# EAGLE board MINI_SAM_D51_009 (EAGLE 9.1.1)
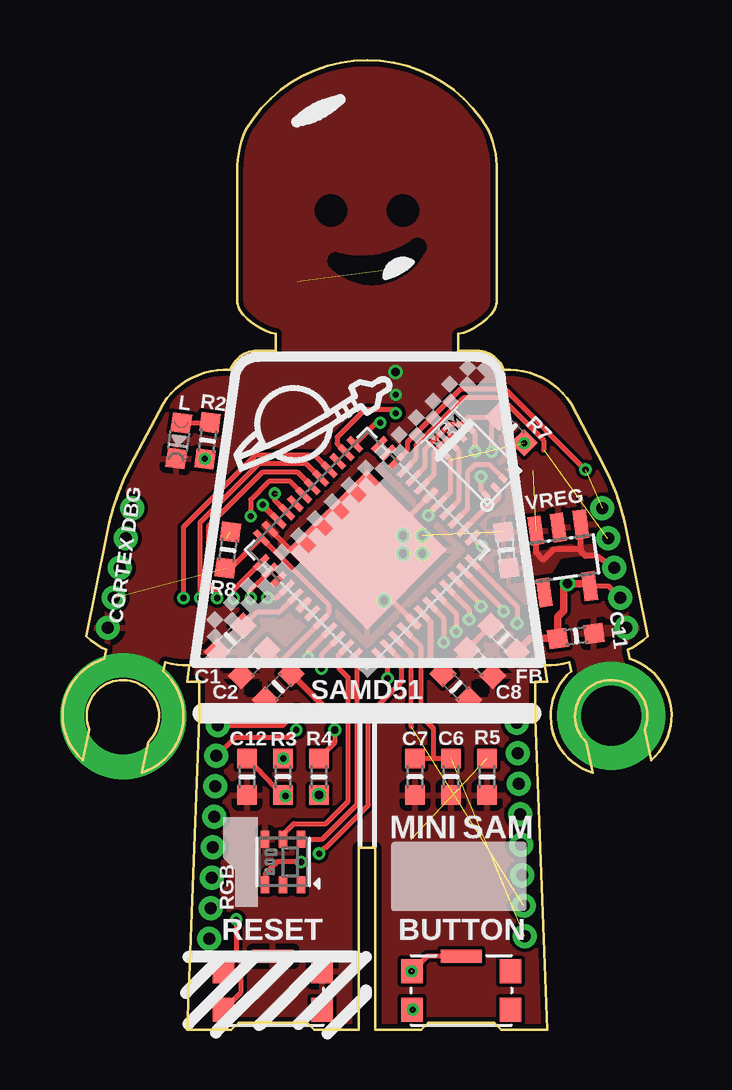
[diagram p0: board, top side]
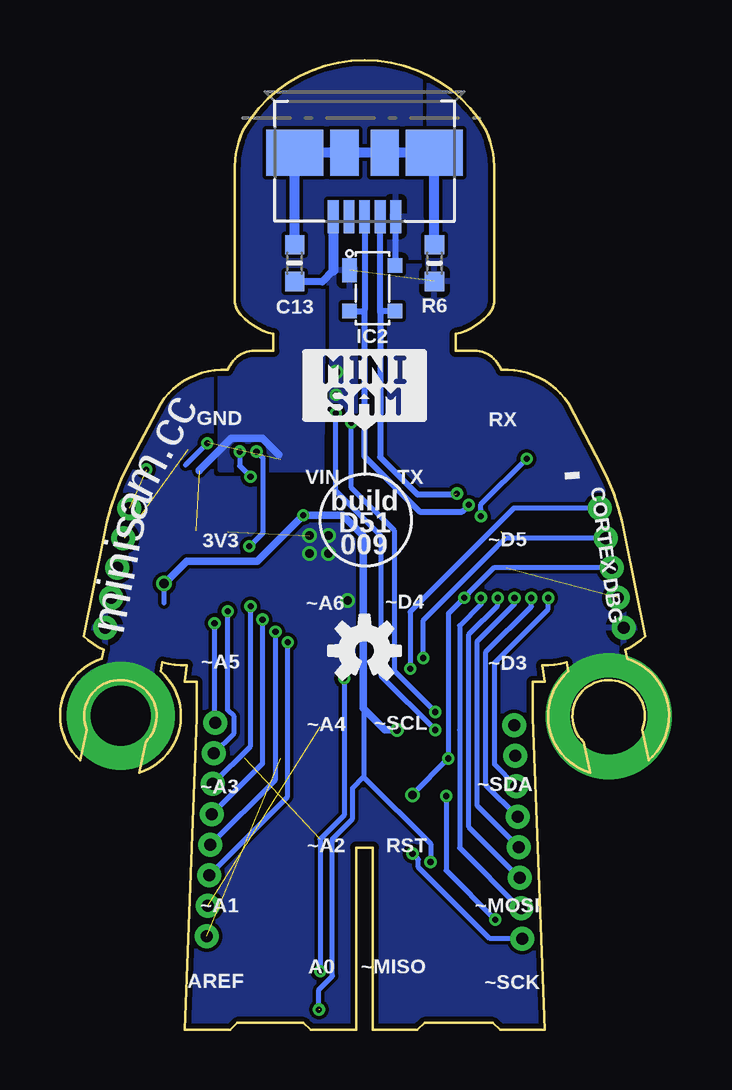
[diagram p1: board, bottom side, seen from below]

Size 25.38 x 40.42 mm. Coordinates in mm from the lower left corner, seen from the top.
Outline: 7.54,29.8 arc-40 7.29,30.3
Outline: 7.29,30.3 7.29,36
Outline: 18.09,30.3 18.09,36
Outline: 7.64,37.5 arc-120 17.74,37.5
Outline: 7.29,36 arc-25 7.64,37.5
Outline: 18.09,36 arc25 17.74,37.5
Outline: 7.54,29.8 arc35 8.89,29
Outline: 17.84,29.8 arc40 18.09,30.3
Outline: 17.84,29.8 arc-35 16.49,29
Outline: 8.01,28.3 arc63 6.99,27.5
Outline: 18.39,27.5 arc63 17.37,28.3
Outline: 6.99,27.5 arc60 4.19,26.1 2.82,23.5 arc18 1.83,20.54 0.99,16.4 arc15 1.82,15.83 1.75,15.46 arc122 0.85,11.24 1.12,12.52 arc-125 2.83,14.54 arc-125 3.56,12
Outline: 18.39,27.5 arc-60 21.19,26.1 22.55,23.5 arc-18 23.55,20.54 24.39,16.4 arc-15 23.55,15.83 23.63,15.46 arc-122 24.53,11.24 24.26,12.52 arc125 22.55,14.54 arc125 21.81,12 22.08,10.72 arc-122 21.19,14.95 21.11,15.31 arc-15 20.09,15.2 20.19,14.5 19.69,14.5 19.69,13 20.19,0 18.29,0 17.99,0.3 15.24,0.3 14.94,0 13.04,0 13.04,7.6 12.34,7.6 12.34,0 10.49,0 10.19,0.3 7.34,0.3 7.04,0 5.19,0 5.69,13 5.69,14.5 5.19,14.5 5.29,15.2 arc-15 4.27,15.31 4.19,14.95 arc-122 3.29,10.72
Outline: 3.56,12 3.29,10.72
Outline: 3.56,12 3.29,10.72
Outline: 8.01,28.3 8.69,28.3 8.89,28.3 8.89,29
Outline: 8.01,28.3 arc63 6.99,27.5
Outline: 18.39,27.5 arc63 17.37,28.3
Outline: 17.37,28.3 16.69,28.3 16.49,28.3 16.49,29
Outline: 7.54,29.8 arc-40 7.29,30.3
Outline: 7.29,30.3 7.29,36
Outline: 18.09,30.3 18.09,36
Outline: 7.64,37.5 arc-120 17.74,37.5
Outline: 7.29,36 arc-25 7.64,37.5
Outline: 18.09,36 arc25 17.74,37.5
Outline: 7.54,29.8 arc35 8.89,29
Outline: 17.84,29.8 arc40 18.09,30.3
Outline: 17.84,29.8 arc-35 16.49,29
Copper layers (1*16): Top 0.035559375mm / dielectric 1.6mm / Bottom 0.035559375mm
Design rules "oshpark-2layer-tented *": minimum track width 6mil, minimum drill 10mil, track to track 6mil, track to pad 6mil, pad to pad 6mil, via to via 6mil, smd to smd 6mil, copper to edge 8mil, drill to drill 6mil, minimum pad ring 5mil, minimum via ring 5mil, stop-mask expansion 2.5mil, vias tented up to drill 20mil, thermal gap 10mil
tRestrict: area 11.1,31.2 to 15,32.9; area 10.9,33.9 to 11.5,34.4; area 13.9,33.9 to 14.5,34.4; 5 lines

## Footprints (pad centres in the part's own frame; a part is rotated, then mirrored left to right if it is on the bottom)
_0603MP = smd 0.8 x 0.8: 1 -0.762,0; 2 0.762,0
SOT143B_REFLOW = smd 1 x 0.6: P1 -0.75,-0.95 | smd 0.6 x 0.6: P2 0.95,-0.95; P$3 0.95,0.95; P$4 -0.95,0.95
TQFN48_7MM = smd 0.25 x 0.75: 1 -2.75,-3.475; 2 -2.25,-3.475; 3 -1.75,-3.475; 4 -1.25,-3.475; 5 -0.75,-3.475; 6 -0.25,-3.475; 7 0.25,-3.475; 8 0.75,-3.475; 9 1.25,-3.475; 10 1.75,-3.475; 11 2.25,-3.475; 12 2.75,-3.475; 25 2.75,3.475; 26 2.25,3.475; 27 1.75,3.475; 28 1.25,3.475; 29 0.75,3.475; 30 0.25,3.475; 31 -0.25,3.475; 32 -0.75,3.475; 33 -1.25,3.475; 34 -1.75,3.475; 35 -2.25,3.475; 36 -2.75,3.475 | smd 0.75 x 0.25: 13 3.475,-2.75; 14 3.475,-2.25; 15 3.475,-1.75; 16 3.475,-1.25; 17 3.475,-0.75; 18 3.475,-0.25; 19 3.475,0.25; 20 3.475,0.75; 21 3.475,1.25; 22 3.475,1.75; 23 3.475,2.25; 24 3.475,2.75; 37 -3.475,2.75; 38 -3.475,2.25; 39 -3.475,1.75; 40 -3.475,1.25; 41 -3.475,0.75; 42 -3.475,0.25; 43 -3.475,-0.25; 44 -3.475,-0.75; 45 -3.475,-1.25; 46 -3.475,-1.75; 47 -3.475,-2.25; 48 -3.475,-2.75 | smd 4.7 x 4.7: THERMAL 0,0
MOLEX_47346-1001 = smd 0.45 x 1.38: P1 1.3,-2.66; P2 0.65,-2.66; P3 0,-2.66; P4 -0.65,-2.66; P5 -1.3,-2.66 | smd 2.375 x 1.9: PAD1 -2.913,0; PAD4 2.913,0 | smd 1.175 x 1.9: PAD2 -0.838,0; PAD3 0.838,0
1X5_HEADER_1.27MM = drill 0.5 pad 1: P$1 -2.54,0; P$2 -1.27,0; P$3 0,0; P$4 1.27,0; P$5 2.54,0
1X8_HEADER_1.27MM = drill 0.5 pad 1: P$1 -4.445,0; P$2 -3.175,0; P$3 -1.905,0; P$4 -0.635,0; P$5 0.635,0; P$6 1.905,0; P$7 3.175,0; P$8 4.445,0
CHIPLED_0603_NOOUTLINE = smd 0.8 x 0.8: A 0,-0.75; C 0,0.75
APA102_2020 = smd 0.7 x 0.35: 1 -0.95,-0.75; 2 -0.95,0; 3 -0.95,0.75; 4 0.95,0.75; 5 0.95,0; 6 0.95,-0.75
KMS_SWITCH = smd 0.9 x 1: 1 -2.05,-0.8; 2 -2.05,0.8; 4 2.05,0.8; 5 2.05,-0.8 | smd 1.7 x 0.55: 3 0,1.425
USON8 = smd 0.35 x 0.25: 1 -1.2,0.75; 2 -1.2,0.25; 3 -1.2,-0.25; 4 -1.2,-0.75; 5 1.2,-0.75; 6 1.2,-0.25; 7 1.2,0.25; 8 1.2,0.75
SOT23-5 = smd 0.55 x 1.2: 1 -0.95,-1.3; 2 0,-1.3; 3 0.95,-1.3; 4 0.95,1.3; 5 -0.95,1.3

## Placement (x,y rotation side)
C1  0.1µF  [_0603MP]  6.99,16.3 225 top
C2  10µF  [_0603MP]  7.99,15.3 225 top
C3  0.1µF  [_0603MP]  8.99,14.3 225 top
C6  4.7µF  [_0603MP]  16.19,10.55 270 top
C7  0.1µF  [_0603MP]  14.69,10.55 270 top
C8  0.1µF  [_0603MP]  17.39,15.3 315 top
C9  10µF  [_0603MP]  16.39,14.3 315 top
C10  10µF  [_0603MP]  18.49,20 278 top
C11  10µF  [_0603MP]  21.39,16.42 7.9 top
C12  0.1µF  [_0603MP]  7.69,10.55 90 top
C13  4.7nF  [_0603MP]  15.6,31.95 270 bottom
FB  [_0603MP]  18.39,16.3 135 top
IC2  PRTR5V0U2X  [SOT143B_REFLOW]  12.36,30.9 270 bottom
IC4  ATSAMD51G_TQFN48  [TQFN48_7MM]  12.69,20 45 top
J1  MOLEX_47346-100147346  [MOLEX_47346-1001]  12.69,36.55 0 bottom
J2  1X5_HEADER_1.27MM  [1X5_HEADER_1.27MM]  2.39,19.25 258.5 top
J3  1X8_HEADER_1.27MM  [1X8_HEADER_1.27MM]  6.29,8.25 267.8 top
J4  1X5_HEADER_1.27MM  [1X5_HEADER_1.27MM]  22.99,19.25 281.5 top
J5  1X8_HEADER_1.27MM  [1X8_HEADER_1.27MM]  19.09,8.35 272.2 top
L  [CHIPLED_0603_NOOUTLINE]  4.84,24.55 172 top
R2  1k  [_0603MP]  6.04,24.55 262 top
R3  330Ohm  [_0603MP]  9.19,10.55 270 top
R4  10K  [_0603MP]  10.69,10.55 90 top
R5  10K  [_0603MP]  17.69,10.55 90 top
R6  1M  [_0603MP]  9.78,31.95 90 bottom
R7  100k  [_0603MP]  18.69,25 135 top
R8  1k  [_0603MP]  6.89,20 262 top
RGB  AP102-2020  [APA102_2020]  9.19,7 90 top
SW1  KMS233GLFG  [KMS_SWITCH]  8.76,1.65 0 top
SW2  KMS233GLFG  [KMS_SWITCH]  16.61,1.65 0 top
U1  GD25x16  [USON8]  17.34,23.65 135 top
U$3  [OSHW-LOGO-S]  12.69,15.8 0 bottom
VREG  AP2112K-3.3V  [SOT23-5]  20.84,19.65 187.9 top

## Library data of the parts
C1-C3 C6-C13 FB IC4 L R2-R8 RGB U1 = microbuilder
IC2 J1-J5 SW1 SW2 = Shockley_Custom
U$3 = SparkFun-Aesthetics
VREG = SparkFun-PowerIC; PROD_ID: VREG-12457

## Nets
!RESET: IC4.40 J2.P$3 R3.1 R4.1
A0: IC4.3 J5.P$7
A1: IC4.7 J5.P$6
A2: IC4.8 J5.P$5
A3: IC4.9 J5.P$4
A4: IC4.10 J5.P$3
A5: IC4.11 J5.P$2
A6: IC4.12 J5.P$1
AREF: C6.1 C7.1 IC4.4 J5.P$8
BUTTON_D6: IC4.1 R5.2 SW2.2 SW2.3
D3: IC4.28 J3.P$3
D4: IC4.29 J3.P$4
D5: IC4.30 J3.P$5
D12: IC4.32
D13: IC4.31 R2.2
DOTSTAR_CLK: IC4.47 RGB.5
DOTSTAR_DATA: IC4.48 RGB.6
GND: C1.2 C2.2 C3.2 C6.2 C7.2 C8.2 C9.2 C10.1 C11.2 C12.1 C13.2 IC2.P1 IC4.5 IC4.18 IC4.35 IC4.42 IC4.THERMAL J1.P5 J2.P$5 J4.P$5 L.C R5.1 R6.1 RGB.4 SW1.3 SW1.4 U1.4 VREG.2
MISO: IC4.38 J3.P$7
MOSI: IC4.37 J3.P$6
N$2: C13.1 J1.PAD1 J1.PAD2 J1.PAD3 J1.PAD4 R6.2
N$3: L.A R2.1
N$4: C12.2 R3.2 SW1.1
N$9: C1.1 IC4.41
QSPI_CS: IC4.20 R7.2 U1.1
QSPI_DATA[0]: IC4.13 U1.5
QSPI_DATA[1]: IC4.14 U1.2
QSPI_DATA[2]: IC4.15 U1.3
QSPI_DATA[3]: IC4.16 U1.7
QSPI_SCK: IC4.19 U1.6
RX_D0: IC4.25 J3.P$1
SCK: IC4.2 J3.P$8
SCL: IC4.22 J4.P$1
SDA: IC4.21 J4.P$2
SWCLK: IC4.45 J2.P$2 R8.1
SWDIO: IC4.46 J2.P$1
TX_D1: IC4.26 J3.P$2
USBD+ [USB_DATA]: IC2.P2 IC4.34 J1.P3
USBD- [USB_DATA]: IC2.P$3 IC4.33 J1.P2
VDD: C2.1 C3.1 C11.1 FB.1 IC4.17 IC4.36 IC4.44 J2.P$4 J4.P$4 R4.2 R7.1 R8.2 RGB.3 SW2.1 U1.8 VREG.5
VDDANA: C8.1 C9.1 FB.2 IC4.6
VIN: C10.2 IC2.P$4 J1.P1 J4.P$3 VREG.1 VREG.3
VSW: IC4.43

## Tracks (layer width: path | path; a pad name or v marks a point on that pad's centre or on a via)
!RESET  (via drill 0.25, 0.35)
  Top 0.203: IC4.40 8.93,18.01 v8.54,18.01 | R3.1 v9.2,11.31
  Bottom 0.203: R4.1 10.69,9.82 v9.2,11.31 9.2,17.35 v8.54,18.01 8.35,18.2 8.35,18.21 7.31,19.25 J2.P$3
  other vias: 10.69,9.79
A0  (1 unrouted)
  Top 0.203: IC4.3 14.54,15.68 14.54,12.63
A1  (via drill 0.25)
  Top 0.203: IC4.7 15.89,17.15 v15.89,16.15
  Bottom 0.203: J5.P$6 15.89,9.72 15.89,16.1 v15.89,16.15
A2  (via drill 0.25)
  Top 0.203: IC4.8 16.4,17.35 v16.4,16.59
  Bottom 0.203: J5.P$5 16.4,10.43 v16.4,16.59
A3  (via drill 0.25)
  Top 0.203: IC4.9 16.94,17.52 v16.94,17.1
  Bottom 0.203: J5.P$4 16.94,11.11 v16.94,17.1
A4  (via drill 0.25)
  Top 0.203: IC4.10 17.44,17.73 v17.44,17.65
  Bottom 0.203: J5.P$3 17.44,11.83 v17.44,17.65
A5  (via drill 0.25)
  Top 0.203: IC4.11 18.39,17.48 v18.39,17.45
  Bottom 0.203: v18.39,17.45 18.39,13.33 18.12,13.06 18.12,12.37 J5.P$2
A6  (via drill 0.25)
  Top 0.203: IC4.12 18.94,17.64 v18.94,16.95
  Bottom 0.203: J5.P$1 18.94,12.81 v18.94,16.95
AREF  (1 unrouted)
  Top 0.203: IC4.4 14.92,16 14.92,13.1 15.44,12.58 15.44,11.31 | C7.1 15.44,11.31 | 15.44,11.31 C6.1
BUTTON_D6  (via drill 0.25)  (2 unrouted)
  Top 0.203: IC4.1 13.54,15.26 v13.54,14.65 | SW2.3 15.19,3.08 SW2.2
  Bottom 0.203: v13.54,14.65 13.54,8.95 14.54,7.95 v14.54,2.45
D3  (via drill 0.25)
  Top 0.203: IC4.28 10.51,23.95 8.03,23.95 5.04,20.96 v5.04,18 | IC4.28
  Bottom 0.203: J3.P$3 7.27,11.06 7.27,15.3 5.04,17.54 v5.04,18
D4  (via drill 0.25)
  Top 0.203: IC4.29 10.16,23.59 8.18,23.59 5.72,21.14 5.72,18.02 v5.74,18 | IC4.29
  Bottom 0.203: J3.P$4 7.63,10.2 7.63,15.75 5.74,17.64 v5.74,18
D5  (via drill 0.25)
  Top 0.203: IC4.30 9.8,23.24 8.33,23.24 6.08,20.99 6.08,18.59 6.44,18.22 v6.44,18 | IC4.30
  Bottom 0.203: J3.P$5 7.98,9.33 7.98,16.21 6.44,17.75 v6.44,18
D13  (via drill 0.25)
  Top 0.203: IC4.31 9.48,22.86 8.6,22.86 7.84,22.1 7.84,21.67 v7.84,21.4
  Bottom 0.203: v7.84,21.4 7.84,21.67 7.84,21.9 R2.2
  other vias: 5.93,23.8
DOTSTAR_CLK
  Top 0.203: RGB.5 9.19,8.13 9.36,8.32 9.64,8.6 10.97,8.6 11.89,9.51 11.89,14.7 11.49,15.1 11.49,15.62 IC4.47
DOTSTAR_DATA
  Top 0.203: RGB.6 10.83,7.95 12.28,9.4 12.28,15.5 IC4.48
GND  (via drill 0.25, 0.35, 2.5 pad 4.5, 3.2 pad 5.25)  (2 unrouted)
  Top 0.203: IC4.5 13.04,18.59 13.04,19.15 | 13.04,19.15 13.04,20 | IC4.18 13.04,20 | 13.04,20 IC4.THERMAL 12.84,19.85 v14.19,19.85 | IC4.35 10.36,19.15 13.04,19.15
  Bottom 0.305: C13.2 14.45,31.18 13.99,31.65
  Bottom 0.406: J1.P5 13.99,31.65
  other vias: 2.52,13.08 22.85,13.09 13.39,17.9 13.87,27.42 14.99,19.85 14.19,20.6 14.99,20.6 13.88,26.46
  pour Top (rank 2): 5.19,0 20.19,0 20.19,12 21.69,12 21.69,14 22.69,14 22.69,12 24.69,12 24.69,42 0.69,42 0.69,12 2.69,12 2.69,14 3.69,14 3.69,12 5.19,12
  pour Bottom (rank 2): 10.39,42 10.39,32 14.19,32 14.19,27.35 24.69,27.35 24.69,12 20.19,12 20.19,0 5.19,0 5.19,12 3.69,12 3.69,14 2.69,14 2.69,12 0.69,12 0.69,42
MISO  (via drill 0.25)
  Top 0.203: v7.84,18 7.84,18.33 7.85,18.34 | IC4.38 8.15,18.64 | 8.15,18.64 | 8.15,18.64 7.85,18.34 | 7.85,18.34
  Bottom 0.203: v7.84,18 7.84,17.74 8.73,16.85 8.73,12.5 8.73,7.59 6.19,5.05 J3.P$7
MOSI  (via drill 0.25)
  Top 0.203: IC4.37 7.14,18.34 v7.14,18
  Bottom 0.203: J3.P$6 6.23,6.35 8.34,8.45 8.34,16.48 7.14,17.68 v7.14,18
N$2
  Bottom 0.406: R6.2 J1.PAD4 J1.PAD3 J1.PAD2 J1.PAD1 C13.1
N$3
  Top 0.203: L.A R2.1
N$4  (via drill 0.25)
  Top 0.203: C12.2 9.19,9.73 R3.2 9.23,9.75 v9.29,9.75 | v7.24,4.6 7.24,3.23 7.42,3.06 7.42,1.55 SW1.1
  Bottom 0.203: v9.29,9.75 9.29,6.65 v7.24,4.6
N$9
  Top 0.203: IC4.41 9.03,17.4 8.09,17.4 C1.1
QSPI_CS  (via drill 0.25)
  Top 0.203: IC4.20 15.09,23.45 15.09,24.21 16.12,25.24 16.6,25.24 16.9,25.54 R7.2 17.89,25.28 v17.89,24.1 | U1.1 17.44,22.49 v17.44,23.05
  Bottom 0.203: v17.89,24.1 17.89,23.5 v17.44,23.05
QSPI_DATA[0]  (via drill 0.25)
  Top 0.203: IC4.13 17.45,20.15 v17.49,20.15 | v17.19,24.1 17.19,24.86 U1.5
  Bottom 0.203: v17.49,20.15 v17.48,20.15 16.91,20.71 16.91,23.83 v17.19,24.1
QSPI_DATA[1]
  Top 0.203: IC4.14 17.67,21.8 17.69,21.8 17.8,21.8 18.19,22.19 18.19,22.45 U1.2
QSPI_DATA[2]
  Top 0.203: IC4.15 16.89,21.73 16.89,23.27 17.18,23.56 17.78,23.56 U1.3
QSPI_DATA[3]
  Top 0.203: IC4.16 16.53,22.07 16.53,24.11 U1.7
QSPI_SCK
  Top 0.203: IC4.19 15.49,23.16 15.49,24.11 16.24,24.85 16.49,24.85 U1.6
RX_D0  (via drill 0.25)
  Top 0.203: J3.P$1 9.18,12.69 v9.74,13.25 | IC4.25 13.07,25.3 v13.24,25.3
  Bottom 0.203: v9.74,13.25 11.44,14.95 11.44,20.8 13.24,22.6 v13.24,25.3
SCK  (via drill 0.25)
  Top 0.203: IC4.2 14.14,15.37 14.14,14.5 12.75,13.11 12.75,9.37 10.98,7.59 10.93,7.59 v10.69,7.35
  Bottom 0.203: v10.69,7.35 10.45,7.11 10.45,6.79 7.47,3.81 J3.P$8
SCL  (via drill 0.25)  (1 unrouted)
  Top 0.203: IC4.22 14.38,24.16 14.38,24.5 16.59,26.71 18.42,26.71 v21.79,23.35
SDA  (1 unrouted)
  Top 0.203: IC4.21 14.73,23.81 14.73,24.35 16.74,26.36 18.25,26.36 20.05,24.57 20.05,24.17
  Bottom 0.203: 22.69,20.5 J4.P$2
SWCLK  (via drill 0.25)  (1 unrouted)
  Top 0.203: IC4.45 10.24,15.78 v10.24,15.5
  Bottom 0.203: v10.24,15.5 10.24,17.07 7.2,20.11 6.81,20.5 J2.P$2
SWDIO  (via drill 0.25)
  Top 0.203: IC4.46 10.79,15.62 v10.79,15.05
  Bottom 0.203: v10.79,15.05 10.79,17.42 6.47,21.74 J2.P$1
TX_D1  (via drill 0.25)
  Top 0.203: J3.P$2 7.19,12.2 9.44,12.2 v9.74,12.5 | v13.89,25.7 13.74,25.85 12.59,25.85 11.44,24.7 11.44,24.43 IC4.26
  Bottom 0.203: v9.74,12.5 11.98,14.74 11.98,20.57 13.89,22.48 v13.89,25.7
USBD+  (via drill 0.25)
  Top 0.254: IC4.34 v8.34,21.87 v8.35,21.88
  Bottom 0.254: J1.P3 12.69,30 | IC2.P2 12.74,29.95 12.69,30 | 12.69,30 12.69,23.89 10.4,21.6 8.62,21.6 v8.35,21.88
USBD-  (via drill 0.25)  (1 unrouted)
  Top 0.203: IC4.33 8.84,22.08 v8.84,22.35
  Bottom 0.254: J1.P2 12.04,30 11.99,29.95 | IC2.P$3 11.99,29.95 | 11.99,29.95 12.04,29.92 12.04,23.87 10.49,22.32 8.94,22.32
VDD  (via drill 0.25, 0.3, 0.4)  (3 unrouted)
  Top 0.203: R8.2 6.97,19.19 IC4.36 11.09,17.71 11.09,17.35 10.76,17.02 IC4.44 9.1,15.35 | v19.24,24.45 | R7.1 v19.24,24.45 | v11.34,12.5 11.34,11.96 R4.2 | IC4.17 16.17,22.42 16.17,23.76 U1.8 | v9.94,7 8.94,7 8.44,6.5 RGB.3 | J4.P$4 22.75,18.49 VREG.5
  Top 0.254: IC4.17 15.24,21.49 v15.24,21.45 | 9.04,15.35 9.02,15.35 C2.1 | 9.04,15.35 9.04,15.33 C3.1 11.34,13.03 v11.34,12.5 | 9.04,15.35 9.1,15.35
  Top 0.305: VREG.5 21.85,18.6 v21.04,18.6 20.89,18.45 20.89,17.47 20.63,17.22 C11.1 19.48,16.32 FB.1
  Bottom 0.203: 21.04,17.79 v21.04,18.6 | v19.24,24.45 20.14,23.54 | 12.71,13.38 12.71,10.55 | 12.71,10.55 12.71,10.53 9.94,7.75 v9.94,7 | 12.71,10.55 13.18,10.08 13.18,8.8 14.03,7.96 14.03,2.24 14.59,1.68 v14.59,0.85
  Bottom 0.305: v21.04,18.6 20.1,19.54 17.15,19.54 v15.24,21.45 13.59,21.45 12.74,20.6 12.74,13.4 12.71,13.38 11.84,12.5 v11.34,12.5
VDDANA
  Top 0.254: FB.2 C8.1 C9.1 15.34,15.35 15.34,17 IC4.6
VIN  (1 unrouted)
  Top 0.254: J4.P$3 22.23,19.75 21.79,19.75 21.6,19.94 21.6,20.05 | 21.6,20.05 VREG.1 | VREG.3 19.72,19.92 20.04,19.6 20.46,20.02 20.66,20.05 21.6,20.05
  Bottom 0.254: J1.P1 11.41,33.87 IC2.P$4
  Bottom 0.305: 16.26,23.96 16.96,24.66 18.24,24.66 18.68,24.22 19.58,23.32 19.58,23.31
  pour Bottom: 10.4,42 10.34,32.2 14.44,32.2 14.49,23.35 18.69,23.35 18.69,42
  pour Top: 19.92,20.88 19.99,20.34 19.57,19.65 18.32,19.66 18.28,17.89 19.56,17.89 20.72,19.76 22.39,19.98 22.09,22.04 21.69,21.98 21.9,20.55 20.56,20.36 20.47,20.95

## Text on the board
tPlace: CORTEX DBG
bPlace: - | CORTEX DBG
tNames: R2 | SAMD51 | MINI | SAM | RESET | BUTTON
bNames: RX | GND | m.cc | TX | VIN | a | ~D5 | build / D51 / 009 | 3V3 | minis | ~D4 | ~A6 | ~D3 | ~A5 | ~SCL | ~A4 | ~SDA | ~A3 | RST | ~A2 | ~MOSI | ~A1 | ~SCK | ~MISO | A0 | AREF
tStop: STATUS | D51
_tNames: L | L | RGB | RGB | IC1 | IC1 | C1 | C1 | FB1 | FB1 | C10 | C11 | C2 | C2 | C3 | C3 | C8 | C8 | C9 | C9 | C6 | C6 | R5 | R5 | C7 | C7 | R3 | R3 | R4 | R4 | C12 | C12
_bNames: IC2 | IC2 | JP1 | JP1